# EAGLE board node5-frontend (EAGLE 5.10), part 1 of 2
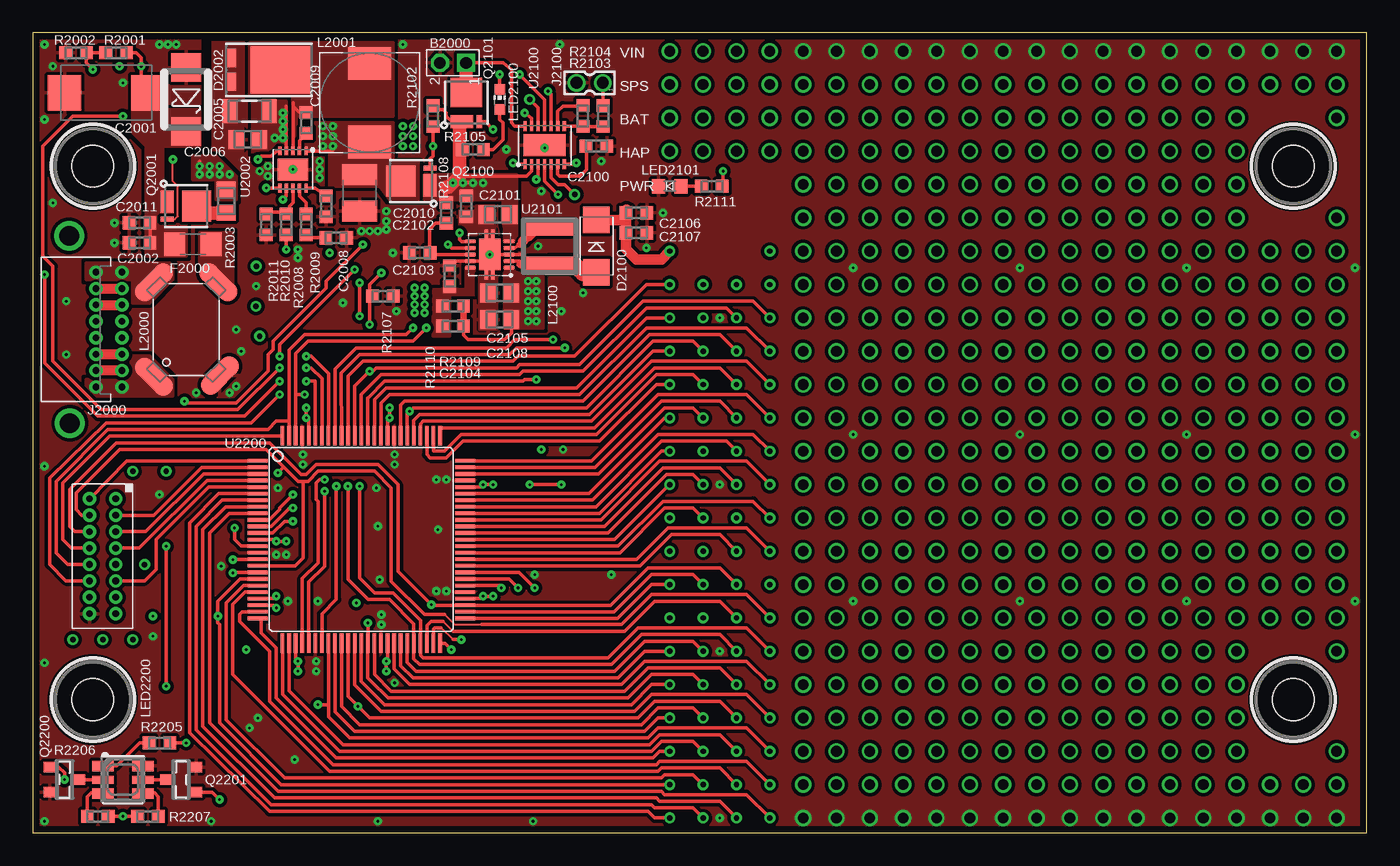
[diagram p0: board, top side]
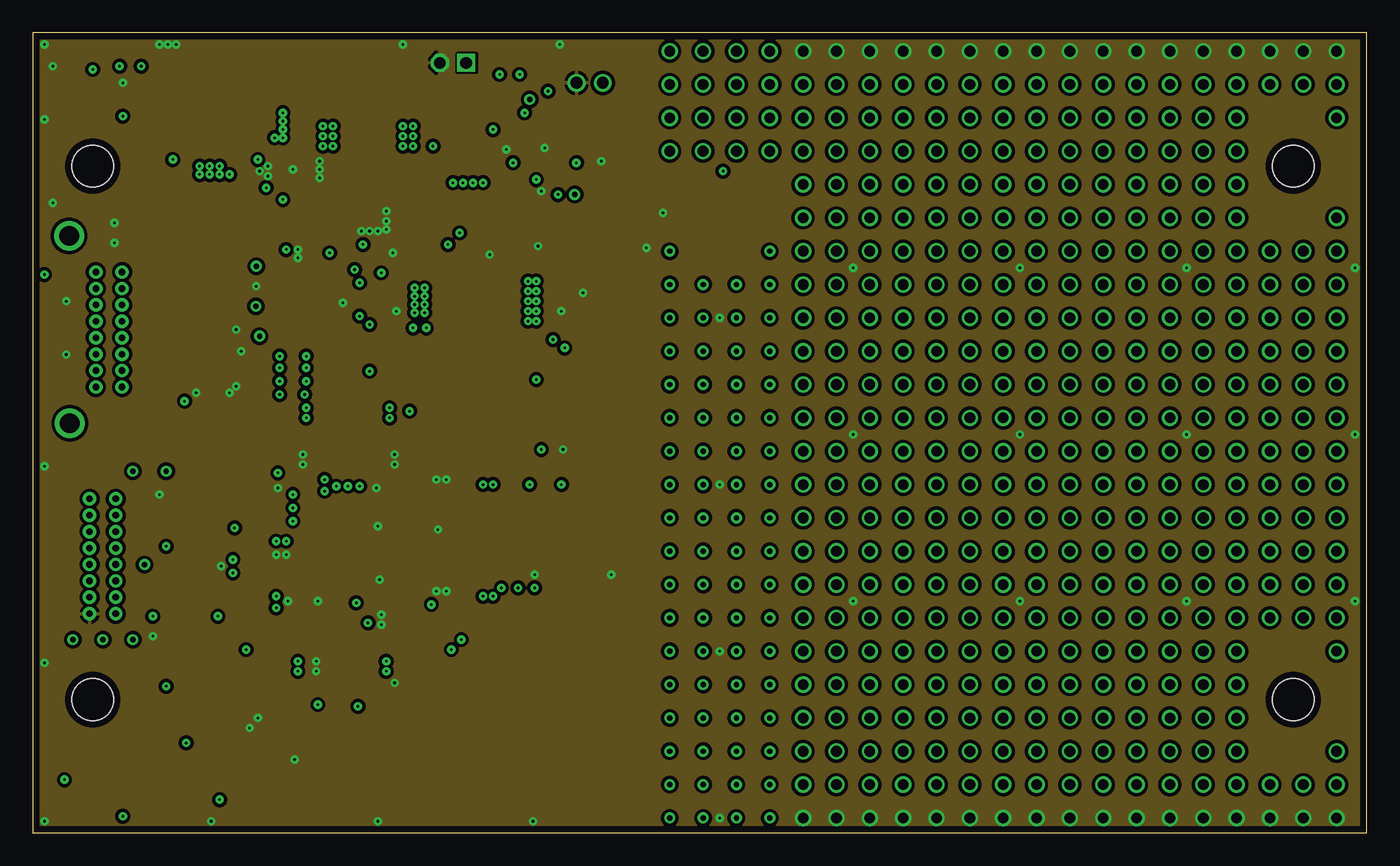
[diagram p1: board, inner layer Route2]
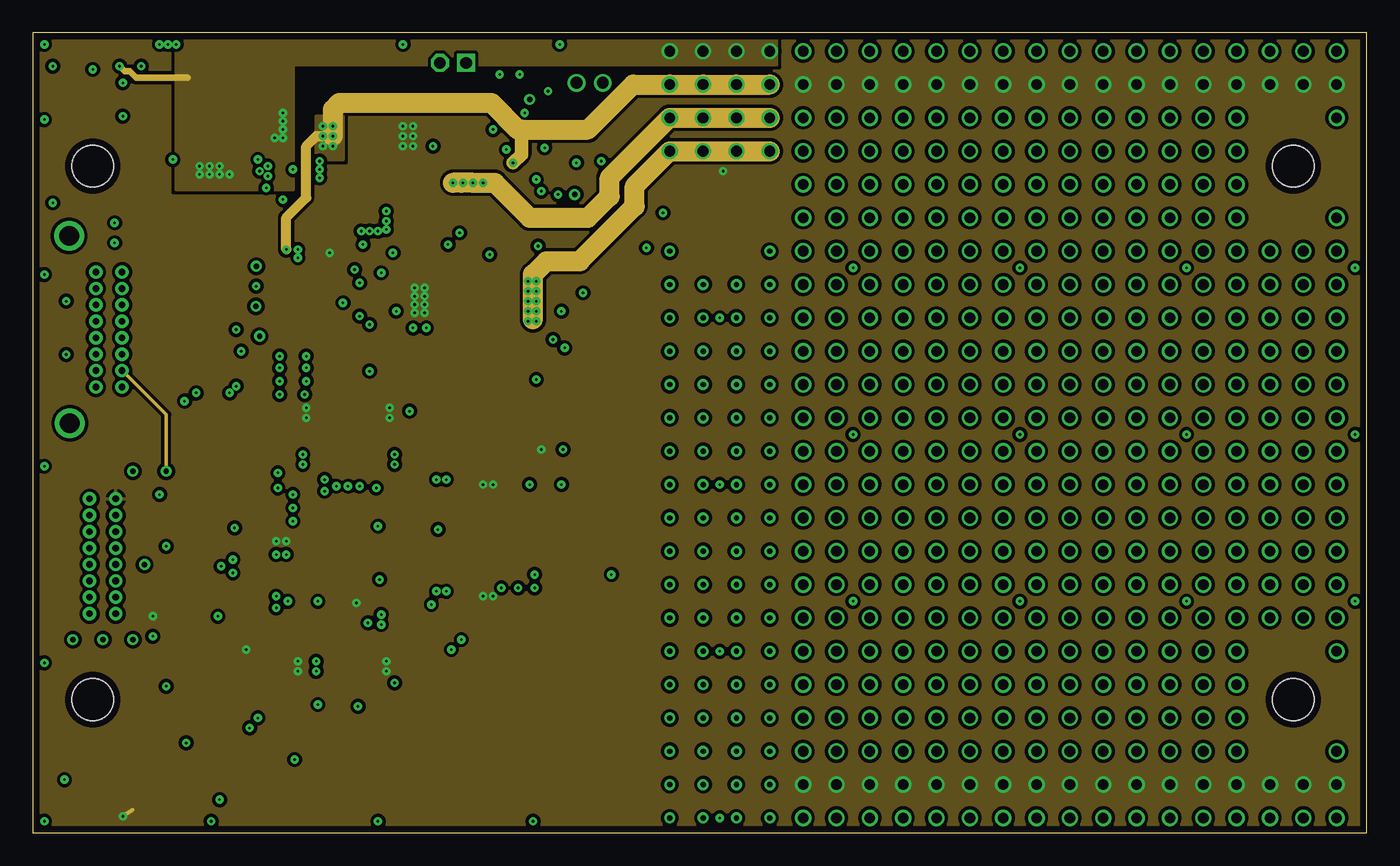
[diagram p2: board, inner layer Route15]
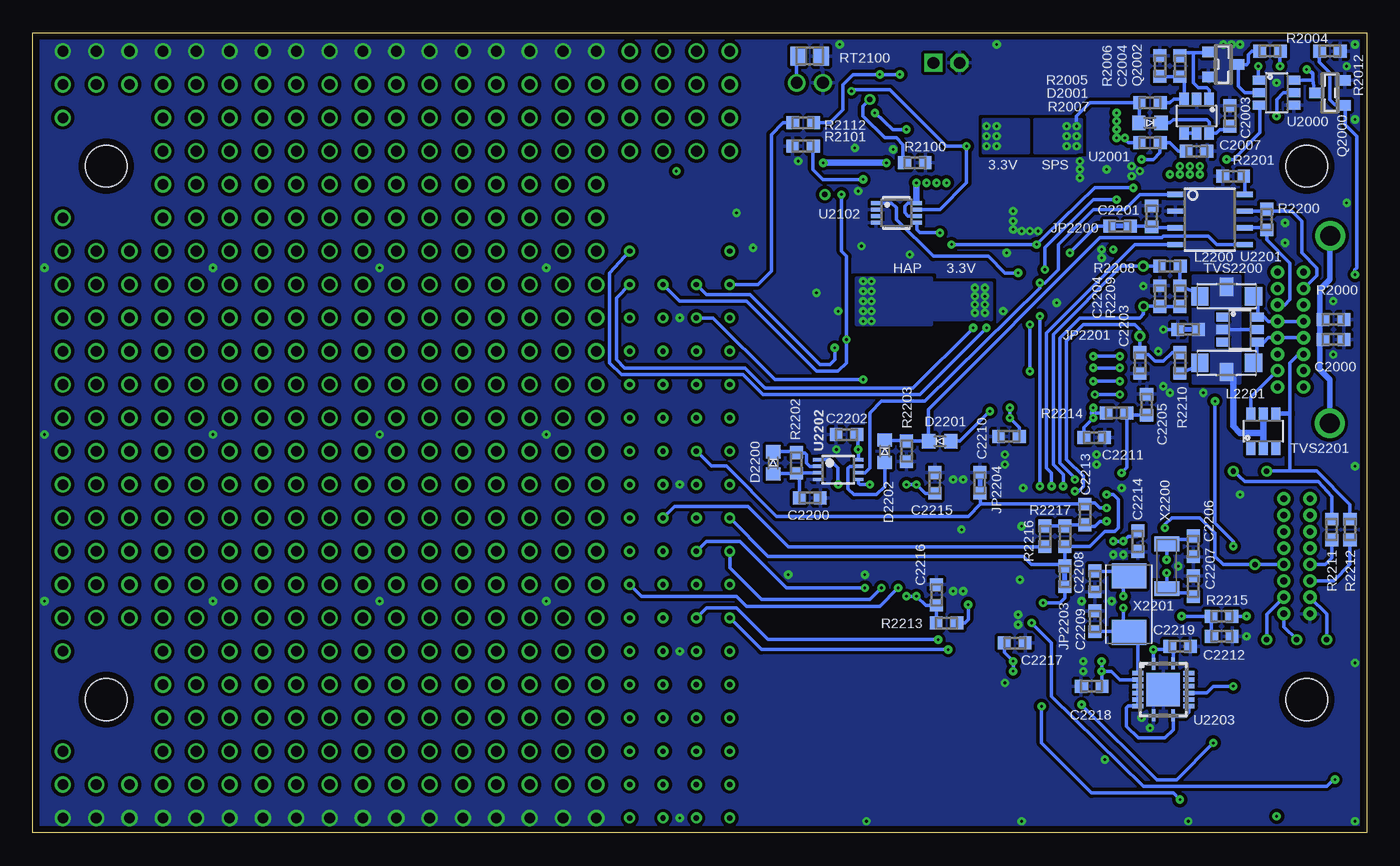
[diagram p3: board, bottom side, seen from below]

Size 101.6 x 60.96 mm. Coordinates in mm from the lower left corner, seen from the top.
Outline: 0,0 101.6,0 101.6,60.96 0,60.96 0,0
Copper layers (1+2*15+16): Top 0.0432mm / dielectric 0.3048mm / Route2 0.0356mm / dielectric 0.7112mm / Route15 0.0356mm / dielectric 0.3023mm / Bottom 0.0432mm
Design rules "sunstone_4lr_rules_v1.3_modifid *": minimum track width 6mil, minimum drill 8mil, track to track 6mil, track to pad 6mil, pad to pad 6mil, via to via 6mil, smd to smd 6mil, copper to edge 20mil, drill to drill 16mil, minimum pad ring 0.2118mm, minimum via ring 0.2118mm, stop-mask expansion 3mil, vias tented up to drill 0mil, thermal gap 10mil
tRestrict: 2 lines

## Footprints (pad centres in the part's own frame; a part is rotated, then mirrored left to right if it is on the bottom)
2MM-1X2-HEADER = drill 0.889 pad 1.372 square: 1 0,-1 | drill 0.889 pad 1.372 octagon: 2 0,1
0603-B-NOSILK = smd 0.95 x 1: 1 -0.8,0; 2 0.8,0
D/7343-31R = smd 2.55 x 2.7: + 3.175,0; - -3.175,0
1206-B = smd 1.15 x 1.8: 1 -1.5,0; 2 1.5,0
0805-B-NOSILK = smd 1.15 x 1.45: 1 -0.9,0; 2 0.9,0
C1210 = smd 1.6 x 2.7: 1 -1.4,0; 2 1.4,0
0603-DIODE = smd 1 x 1.1: A -0.85,0; K 0.85,0
D_POWERDI5 = smd 0.8 x 1.4: ANODE1 -3.47,-0.8; ANODE2 -3.47,1 | smd 4.7 x 3.6: CATHODE 0.4,0.1
NMINIP2-J1 = smd 2 x 2: A 2,0; C -2,0
1206 = smd 1.6 x 1.8: 1 -1.4,0; 2 1.4,0
#4/.250-BARE+STD_WASHER = hole 3.175: 0,0
ROCKETBUS-PKG = drill 0.508 pad 1.016 round: AUX_1@1 0,-1.875; AUX_1@2 2,-1.875; AUX_2@1 0,-3.125; AUX_2@2 2,-3.125; B+@1 0,4.375; B+@2 2,4.375; B-@1 0,-4.375; B-@2 2,-4.375; CAN_H@1 0,3.125; CAN_H@2 2,3.125; CAN_L@1 0,1.875; CAN_L@2 2,1.875; USB_H@1 0,0.625; USB_H@2 2,0.625; USB_L@1 0,-0.625; USB_L@2 2,-0.625 | drill 1.511 round: CHASSIS@1 -2.032,7.136; CHASSIS@2 -1.982,-7.136
87758-0216 = drill 0.9 pad 1.27 round: 1 0,-1; 2 0,1
JST-16R-JED = drill 0.508 pad 1.016 round: 1 2,4.375; 2 0,4.375; 3 2,3.125; 4 0,3.125; 5 2,1.875; 6 0,1.875; 7 2,0.625; 8 0,0.625; 9 2,-0.625; 10 0,-0.625; 11 2,-1.875; 12 0,-1.875; 13 2,-3.125; 14 0,-3.125; 15 2,-4.375; 16 0,-4.375
0603-B-NO-SILK-JUMPER = smd 0.95 x 1: 1 -0.8,0; 2 0.8,0
CMS1 = smd 3.5 x 1.5 rotated 45: 1 3.608,-2.462; 3 -3.608,2.462 | smd 3.5 x 1.5 rotated 315: 2 3.508,2.562; 4 -3.608,-2.462
L-DR74 = smd 2.5 x 3.25: 1 -3,0; 2 3,0
L_NR4018 = smd 1.2 x 3.7: 1 -1.4,0; 2 1.4,0
EXC-CET = smd 1.3 x 1.4: 1 -2.05,0; 2 2.05,0 | smd 1 x 1.4: C 0,-0.7
CHIP-LED0603 = smd 0.8 x 0.8: A 0,-0.75; C 0,0.75
PLCC-6 = smd 1.65 x 0.8: 1 -1.525,1.05; 3 -1.525,-1.05; 4 1.525,-1.05; 6 1.525,1.05 | smd 1.65 x 0.6: 2 -1.525,0; 5 1.525,0
SOT23 = smd 0.787 x 0.889: 1 -0.953,-1.143; 2 0.953,-1.143; 3 0,1.143
1212-8_POWERPAK = smd 0.99 x 1.725: 1-2-3 -1.45,0.33 | smd 0.99 x 0.405: 4 -1.45,-0.99 | smd 2.24 x 2.39: 5-6-7-8 0.797,0
PAD_ROUND-APC-FREE_0.1/016 = drill 0.406 round: PAD 0,0
DO-214AA/SMB = smd 2.159 x 2.261: ANODE -2.438,0; CATHODE 2.438,0
SOT23-6 = smd 0.7 x 1: 1 -0.95,-1.3; 2 0,-1.3; 3 0.95,-1.3; 4 0.95,1.3; 5 0,1.3; 6 -0.95,1.3
DFN-10 = smd 0.25 x 0.675: BD -1,-1.413; BOOST -0.5,-1.413; FB 0,1.413; PG 0.5,1.413; RT -1,1.413; RUN/SS 1,-1.413; SW 0,-1.413; SYNC 1,1.413; VC -0.5,1.413; VIN 0.5,-1.413 | smd 2.38 x 1.65: GND 0,0
DFN-14 = smd 0.25 x 0.7: 1 -1.5,-1.45; 2 -1,-1.45; 3 -0.5,-1.45; 4 0,-1.45; 5 0.5,-1.45; 6 1,-1.45; 7 1.5,-1.45; 8 1.5,1.45; 9 1,1.45; 10 0.5,1.45; 11 0,1.45; 12 -0.5,1.45; 13 -1,1.45; 14 -1.5,1.45 | smd 3.3 x 1.7: PGND 0,0
SON-10 = smd 0.28 x 0.85: EN 1,1.475; FB -1,1.475; GND -0.5,1.475; L1 0.5,-1.475; L2 -0.5,-1.475; PGND 0,-1.475; PS/SYNC 0.5,1.475; VIN 1,-1.475; VINA 0,1.475; VOUT -1,-1.475 | smd 2.4 x 1.65: PGND@1 0,0 | smd 3.8 x 0.28: PGND@2 0,0.25; PGND@3 0,-0.25
VSSOP-8 = smd 0.3 x 0.8: 1 -0.75,-1.55; 2 -0.25,-1.55; 3 0.25,-1.55; 4 0.75,-1.55; 5 0.75,1.55; 6 0.25,1.55; 7 -0.25,1.55; 8 -0.75,1.55
LQFP100 = smd 0.28 x 1.5: #RESET 2,-7.9; #RSTOUT 0.5,-7.9; #TRST -4.5,-7.9; P0[15]/TXD1/SCK0/SCK 0.5,7.9; P0[16]/RXD1/SSEL0/SSEL 0,7.9; P0[17]/CTS1/MISO0/MISO 1,7.9; P0[18]/DCD1/MOSI0/MOSI 1.5,7.9; P0[19]/DSR1/MCICLK/SDA1 2,7.9; P0[20]/DTR1/MCICMD/SCL1 2.5,7.9; P0[21]/RI1/MCIPWR/RD1 3,7.9; P0[22]/RTS1/MCIDAT0/TD1 3.5,7.9; P0[23]/AD0[0]/I2SRX_CLK/CAP3[0] -2,-7.9; P0[24]/AD0[1]/I2SRX_WS/CAP3[1] -2.5,-7.9; P0[25]/AD0[2]/I2SRX_SDA/TXD3 -3,-7.9; P0[26]/AD0[3]/AOUT/RXD3 -3.5,-7.9; P0[27]/SDA0 6,-7.9; P0[28]/SCL0 5.5,-7.9; P1[30]/VBUS/AD0[4] 4,-7.9; P1[31]/SCK1/AD0[5] 3.5,-7.9; P2[0]/PWM1[1]/TXD1/TRACECLK -6,7.9; P2[1]/PWM1[2]/RXD1/PIPESTAT0 -5.5,7.9; P2[2]/PWM1[3]/CTS1/PIPESTAT1 -5,7.9; P2[3]/PWM1[4]/DCD1/PIPESTAT2 -3.5,7.9; P2[4]/PWM1[5]/DSR1/TRACESYNC -3,7.9; P2[5]/PWM1[6]/DTR1/TRACEPKT0 -2.5,7.9; P2[6]/PCAP1[0]/RI1/TRACEPKT1 -2,7.9; P2[7]/RD2/RTS1/TRACEPKT2 -1.5,7.9; P2[8]/TD2/TXD2/TRACEPKT3 -1,7.9; P2[9]/USB_CONNECT/RXD2/EXTIN0 -0.5,7.9; P2[10]/#EINT0 5,7.9; P2[11]/#EINT1/MCIDAT1/I2STX_CLK 5.5,7.9; P2[12]/#EINT2/MCIDAT2/I2STX_WS 6,7.9; RTCX1 1.5,-7.9; RTCX2 2.5,-7.9; TCK -4,-7.9; TDI -5.5,-7.9; TDO -6,-7.9; TMS -5,-7.9; VBAT 3,-7.9; VDD(3V3)@1 4.5,7.9; VDD(3V3)@2 -4,7.9; VDD(DCDC)(3V3) 0,-7.9; VDDA -1.5,-7.9; VREF -0.5,-7.9; VSS 1,-7.9; VSS@3 4,7.9; VSS@4 -4.5,7.9; VSSA -1,-7.9; XTAL1 4.5,-7.9; XTAL2 5,-7.9 | smd 1.5 x 0.28: P0[0]/RD1/TXD3/SDA1 7.9,4; P0[1]/TD1/RXD3/SCL1 7.9,4.5; P0[2]/TXD0 -7.9,-5; P0[3]/RXD0 -7.9,-5.5; P0[4]/I2SRX_CLK/RD2/CAP2[0] -7.9,3.5; P0[5]/I2SRX_WS/TD2/CAP2[1] -7.9,4; P0[6]/I2SRX_SDA/SSEL1/MAT2[0] -7.9,4.5; P0[7]/I2STX_CLK/SCK1/MAT2[1] -7.9,5; P0[8]/I2STX_WS/MISO1/MAT2[2] -7.9,5.5; P0[9]/I2STX_SDA/MOSI1/MAT2[3] -7.9,6; P0[10]/TXD2/SDA2/MAT3[0] 7.9,5; P0[11]/RXD2/SCL2/MAT3[1] 7.9,5.5; P0[29]/USB_D+ 7.9,-4.5; P0[30]/USB_D- 7.9,-4; P1[0]/ENET_TXD0 -7.9,-3.5; P1[1]/ENET_TXD1 -7.9,-3; P1[4]/ENET_TX_EN -7.9,-2.5; P1[8]/ENET_CRS -7.9,-2; P1[9]/ENET_RXD0 -7.9,-1.5; P1[10]/ENET_RXD1 -7.9,-1; P1[14]/ENET_RX_ER -7.9,-0.5; P1[15]/ENET_REF_CLK -7.9,0; P1[16]/ENET_MDC -7.9,0.5; P1[17]/ENET_MDIO -7.9,1; P1[18]/USB_UP_LED/PWM1[1]/CAP1[0] 7.9,-3; P1[19]/CAP1[1] 7.9,-2.5; P1[20]/PWM1[2]/SCK0 7.9,-2; P1[21]/PWM1[3]/SSEL0 7.9,-1.5; P1[22]MAT1[0] 7.9,-1; P1[23]/PWM1[4]/MISO0 7.9,-0.5; P1[24]/PWM1[5]/MOSI0 7.9,0; P1[25]/MAT1[1] 7.9,0.5; P1[26]/PWM1[6]/CAP0[0] 7.9,1; P1[27]/CAP0[1] 7.9,2.5; P1[28]/PCAP1[0]/MAT0[0] 7.9,3; P1[29]/PCAP1[1]/MAT0[1] 7.9,3.5; P2[13]/#EINT3/MCIDAT3/I2STX_SDA 7.9,6; P3[25]/MAT0[0]/PWM1[2] 7.9,-5.5; P3[26]/MAT0[1]/PWM1[3] 7.9,-6; P4[28]/MAT2[0]/TXD3 -7.9,3; P4[29]/MAT2[1]/RXD3 -7.9,1.5; RTCK -7.9,-6; VDD(3V3) 7.9,-5; VDD(3V3)@3 -7.9,-4; VDD(DCDC)(3V3)@1 7.9,2; VDD(DCDC)(3V3)@2 -7.9,2; VSS@1 7.9,-3.5; VSS@2 7.9,1.5; VSS@5 -7.9,-4.5; VSS@6 -7.9,2.5
DR-PDSO-G8 = smd 0.4 x 1.2: 1 -1.905,-2.65; 2 -0.635,-2.65; 3 0.635,-2.65; 4 1.905,-2.65; 5 1.905,2.65; 6 0.635,2.65; 7 -0.635,2.65; 8 -1.905,2.65
DCU = smd 0.25 x 0.75: 1 -0.75,-1.55; 2 -0.25,-1.55; 3 0.25,-1.55; 4 0.75,-1.55; 5 0.75,1.55; 6 0.25,1.55; 7 -0.25,1.55; 8 -0.75,1.55
QFN-16 = smd 0.85 x 0.28: 1 -1.97,-0.75; 8 1.97,-0.74; 9 1.97,0.75; 16 -1.98,0.75 | smd 0.28 x 0.85: 2 -1.25,-1.95; 3 -0.75,-1.95; 4 -0.25,-1.95; 5 0.25,-1.95; 6 0.75,-1.95; 7 1.25,-1.95; 10 1.25,1.95; 11 0.75,1.95; 12 0.25,1.95; 13 -0.25,1.95; 14 -0.75,1.95; 15 -1.25,1.95 | smd 2.55 x 2.55: PGND 0,0
CM415 = smd 1.118 x 1.905: P$1 -1.702,0; P$2 1.702,0
CS10 = smd 1.9 x 2.6: P$1 -2.15,0; P$2 2.15,0

## Placement (x,y rotation side)
B2100  BATTERY_SINGLE_CELL_2MM  [2MM-1X2-HEADER]  32,58.67 90 top
C2000  100n 50V  [0603-B-NOSILK]  2.54,37.59 0 bottom
C2001  22u 50V  [D/7343-31R]  5.59,56.39 0 top
C2002  330n 50V  [0603-B-NOSILK]  8.13,44.96 0 top
C2003  2.7u  [0603-B-NOSILK]  10.41,54.61 270 bottom
C2004  15n  [0603-B-NOSILK]  14.22,58.42 90 bottom
C2005  10u 50V  [1206-B]  16.51,54.99 180 top
C2006  1u 50V  [0805-B-NOSILK]  16.38,52.83 180 top
C2007  100n  [0603-B-NOSILK]  12.95,51.94 180 bottom
C2008  680p  [0603-B-NOSILK]  23.11,45.34 180 top
C2009  220n  [0603-B-NOSILK]  20.83,54.1 90 top
C2010  22u  [C1210]  24.89,48.77 270 top
C2011  10n 50V  [0603-B-NOSILK]  8.13,46.48 0 top
C2100  66n  [0603-B-NOSILK]  42.93,52.32 180 top
C2101  10u  [0805-B-NOSILK]  35.43,47.12 0 top
C2102  100n  [0603-B-NOSILK]  33.02,47.75 90 top
C2103  100n  [0603-B-NOSILK]  29.46,44.2 0 top
C2104  2pF  [0603-B-NOSILK]  32,38.61 0 top
C2105  10u  [0805-B-NOSILK]  35.56,41.15 0 top
C2106  TBD  [0603-B-NOSILK]  45.97,47.24 180 top
C2107  TBD  [0603-B-NOSILK]  45.97,45.72 180 top
C2108  10u  [0805-B-NOSILK]  35.56,39.12 0 top
C2200  10n  [0603-B-NOSILK]  42.42,25.53 180 bottom
C2201  100n  [0603-B-NOSILK]  16.38,46.99 90 bottom
C2202  100n  [0603-B-NOSILK]  39.62,30.35 180 bottom
C2203  18p  [0603-B-NOSILK]  17.27,35.81 90 bottom
C2204  18p  [0603-B-NOSILK]  15.75,40.89 270 bottom
C2205  100n  [0603-B-NOSILK]  16.76,32.64 90 bottom
C2206  22p  [0603-B-NOSILK]  13.21,21.84 90 bottom
C2207  22p  [0603-B-NOSILK]  13.21,18.8 270 bottom
C2208  39p  [0603-B-NOSILK]  20.7,19.18 90 bottom
C2209  33p  [0603-B-NOSILK]  20.7,16.13 270 bottom
C2210  100n  [0603-B-NOSILK]  27.24,30.21 180 bottom
C2211  100n  [0603-B-NOSILK]  20.76,30.12 0 bottom
C2212  100n  [0603-B-NOSILK]  11.05,14.99 0 bottom
C2213  100n  [0603-B-NOSILK]  21.46,24.26 270 bottom
C2214  100n  [0603-B-NOSILK]  17.43,22.23 270 bottom
C2215  100n  [0603-B-NOSILK]  32.89,26.67 90 bottom
C2216  100n  [0603-B-NOSILK]  32.77,18.14 90 bottom
C2217  100n  [0603-B-NOSILK]  26.8,14.48 180 bottom
C2218  100n  [0603-B-NOSILK]  20.95,11.18 0 bottom
C2219  100n  [0603-B-NOSILK]  14.22,14.22 0 bottom
D2001  CDSU101A  [0603-DIODE]  16.51,54.1 0 bottom
D2002  PDS340  [D_POWERDI5]  18.54,58.04 0 top
D2100  MA2Q705  [NMINIP2-J1]  42.93,44.7 270 top
D2200  CDSU101A  [0603-DIODE]  45.21,28.19 90 bottom
D2201  CDSU101A  [0603-DIODE]  32.51,29.84 180 bottom
D2202  CDSU101A  [0603-DIODE]  36.7,29.08 90 bottom
F2000  2.0A Fast  [1206]  12.19,44.83 180 top
FST2000  #4-BARE_MOUNTING_HOLE/.250  [#4/.250-BARE+STD_WASHER]  4.57,50.8 0 top
FT2001  #4-BARE_MOUNTING_HOLE/.250  [#4/.250-BARE+STD_WASHER]  4.57,10.16 0 top
FT2002  #4-BARE_MOUNTING_HOLE/.250  [#4/.250-BARE+STD_WASHER]  96.01,10.16 0 top
FT2003  #4-BARE_MOUNTING_HOLE/.250  [#4/.250-BARE+STD_WASHER]  96.01,50.8 0 top
J2000  ROCKETBUS  [ROCKETBUS-PKG]  4.8,38.35 0 top
J2100  87758-0216  [87758-0216]  42.42,57.15 90 top
J2204  DEBUG-CONNECTOR  [JST-16R-JED]  4.32,21.08 0 top
JP2200  0603-B-NO-SILK-CUT-JUMPER  [0603-B-NO-SILK-JUMPER]  18.8,46.23 180 bottom
JP2201  0603-B-NO-SILK-CUT-JUMPER  [0603-B-NO-SILK-JUMPER]  13.59,38.35 180 bottom
JP2203  0603-B-NO-SILK-CUT-JUMPER  [0603-B-NO-SILK-JUMPER]  22.99,19.56 90 bottom
JP2204  0603-B-NO-SILK-CUT-JUMPER  [0603-B-NO-SILK-JUMPER]  29.46,26.67 270 bottom
L2000  CMS1  [CMS1]  11.68,38.35 270 top
L2001  L_DR74-6R8-R  [L-DR74]  25.65,55.63 270 top
L2100  2.2 uH L_NR4018T2R2M  [L_NR4018]  39.37,44.7 270 top
L2200  EXC-CET471U  [EXC-CET]  10.67,40.89 180 bottom
L2201  FILTER_EMI-EXC-CET  [EXC-CET]  10.67,35.81 0 bottom
LED2100  RED  [CHIP-LED0603]  35.56,55.88 0 top
LED2101  LED-GRN-  [0603-DIODE]  48.51,49.28 180 top
LED2200  [PLCC-6]  6.86,4.06 0 top
Q2000  PMV45EN  [SOT23]  2.79,56.39 90 bottom
Q2001  Si7309DN  [1212-8_POWERPAK]  11.68,47.75 0 top
Q2002  PMV45EN  [SOT23]  10.92,58.55 270 bottom
Q2100  SI7123DN  [1212-8_POWERPAK]  28.83,49.66 180 top
Q2101  SI7123DN  [1212-8_POWERPAK]  33.02,55.63 90 top
Q2200  PMV45EN  [SOT23]  2.41,4.06 270 top
Q2201  PMV45EN  [SOT23]  11.3,4.06 90 top
R2000  100k  [0603-B-NOSILK]  2.54,39.12 0 bottom
R2001  61.9k  [0603-B-NOSILK]  6.35,59.44 0 top
R2002  10k  [0603-B-NOSILK]  3.3,59.44 0 top
R2003  .033  [0805-B-NOSILK]  14.73,48.13 90 top
R2004  1k  [0603-B-NOSILK]  7.37,59.56 0 bottom
R2005  34.0k 1%  [0603-B-NOSILK]  16.51,55.63 180 bottom
R2006  10k 1%  [0603-B-NOSILK]  15.75,58.42 270 bottom
R2007  500k  [0603-B-NOSILK]  16.51,52.58 180 bottom
R2008  15k  [0603-B-NOSILK]  20.83,46.35 90 top
R2009  26.7k  [0603-B-NOSILK]  22.35,47.75 90 top
R2010  532k  [0603-B-NOSILK]  19.3,46.35 270 top
R2011  100k  [0603-B-NOSILK]  17.78,46.35 90 top
R2012  10k  [0603-B-NOSILK]  2.79,59.56 180 bottom
R2100  100k  [0603-B-NOSILK]  34.42,51.05 0 bottom
R2101  660  [0603-B-NOSILK]  42.93,52.32 180 bottom
R2102  1k  [0603-B-NOSILK]  30.48,54.61 90 top
R2103  121k 1%  [0603-B-NOSILK]  41.91,54.61 270 top
R2104  15k 1%  [0603-B-NOSILK]  43.43,54.61 90 top
R2105  1.6k  [0603-B-NOSILK]  33.53,52.07 0 top
R2107  1k  [0603-B-NOSILK]  26.67,40.89 180 top
R2108  100  [0603-B-NOSILK]  31.5,47.24 90 top
R2109  1.0M  [0603-B-NOSILK]  32,40.13 0 top
R2110  200k  [0603-B-NOSILK]  31.75,42.42 270 top
R2111  1k  [0603-B-NOSILK]  51.71,49.28 0 top
R2112  10k  [0603-B-NOSILK]  42.93,54.1 0 bottom
R2200  NP  [0603-B-NOSILK]  7.62,46.74 90 bottom
R2201  18k  [0603-B-NOSILK]  10.16,50.04 0 bottom
R2202  10k  [0603-B-NOSILK]  43.43,28.19 90 bottom
R2203  10k  [0603-B-NOSILK]  35.05,29.08 90 bottom
R2205  1k  [0603-B-NOSILK]  9.65,6.86 0 top
R2206  1k  [0603-B-NOSILK]  4.95,1.27 180 top
R2207  1k  [0603-B-NOSILK]  8.76,1.27 0 top
R2208  1.5k  [0603-B-NOSILK]  14.99,43.18 180 bottom
R2209  33.2  [0603-B-NOSILK]  14.22,40.89 270 bottom
R2210  33.2  [0603-B-NOSILK]  14.22,35.81 90 bottom
R2211  100  [0603-B-NOSILK]  2.67,23.11 270 bottom
R2212  100  [0603-B-NOSILK]  1.27,23.11 270 bottom
R2213  10k  [0603-B-NOSILK]  32,16 180 bottom
R2214  10k  [0603-B-NOSILK]  19.05,32 180 bottom
R2215  0  [0603-B-NOSILK]  11.05,16.51 180 bottom
R2216  0  [0603-B-NOSILK]  24.51,22.61 90 bottom
R2217  0  [0603-B-NOSILK]  22.99,22.61 90 bottom
RT2100  100k @25C  [0805-B-NOSILK]  42.42,59.18 0 bottom
TP0.0  PAD_ROUND016  [PAD_ROUND-APC-FREE_0.1/016]  53.59,13.84 90 top
TP0.1  PAD_ROUND016  [PAD_ROUND-APC-FREE_0.1/016]  56.13,13.84 90 top
TP0.2  PAD_ROUND016  [PAD_ROUND-APC-FREE_0.1/016]  56.13,41.78 180 top
TP0.3  PAD_ROUND016  [PAD_ROUND-APC-FREE_0.1/016]  56.13,44.32 180 top
TP0.4  PAD_ROUND016  [PAD_ROUND-APC-FREE_0.1/016]  51.05,36.7 270 top
TP0.5  PAD_ROUND016  [PAD_ROUND-APC-FREE_0.1/016]  48.51,36.7 270 top
TP0.6  PAD_ROUND016  [PAD_ROUND-APC-FREE_0.1/016]  56.13,34.16 270 top
TP0.7  PAD_ROUND016  [PAD_ROUND-APC-FREE_0.1/016]  48.51,34.16 270 top
TP0.8  PAD_ROUND016  [PAD_ROUND-APC-FREE_0.1/016]  51.05,34.16 270 top
TP0.9  PAD_ROUND016  [PAD_ROUND-APC-FREE_0.1/016]  53.59,34.16 270 top
TP0.10  PAD_ROUND016  [PAD_ROUND-APC-FREE_0.1/016]  53.59,16.38 90 top
TP0.11  PAD_ROUND016  [PAD_ROUND-APC-FREE_0.1/016]  51.05,16.38 90 top
TP0.12  PAD_ROUND016  [PAD_ROUND-APC-FREE_0.1/016]  37.85,55.88 0 top
TP0.15  PAD_ROUND016  [PAD_ROUND-APC-FREE_0.1/016]  56.13,24 270 top
TP0.16  PAD_ROUND016  [PAD_ROUND-APC-FREE_0.1/016]  48.51,26.54 270 top
TP0.17  PAD_ROUND016  [PAD_ROUND-APC-FREE_0.1/016]  51.05,24 270 top
TP0.18  PAD_ROUND016  [PAD_ROUND-APC-FREE_0.1/016]  56.13,21.46 270 top
TP0.19  PAD_ROUND016  [PAD_ROUND-APC-FREE_0.1/016]  53.59,21.46 270 top
TP0.20  PAD_ROUND016  [PAD_ROUND-APC-FREE_0.1/016]  51.05,21.46 270 top
TP0.21  PAD_ROUND016  [PAD_ROUND-APC-FREE_0.1/016]  48.51,21.46 270 top
TP0.22  PAD_ROUND016  [PAD_ROUND-APC-FREE_0.1/016]  56.13,18.92 270 top
TP0.23  PAD_ROUND016  [PAD_ROUND-APC-FREE_0.1/016]  56.13,1.14 90 top
TP0.24  PAD_ROUND016  [PAD_ROUND-APC-FREE_0.1/016]  53.59,1.14 270 top
TP0.25  PAD_ROUND016  [PAD_ROUND-APC-FREE_0.1/016]  51.05,1.14 180 top
TP0.26  PAD_ROUND016  [PAD_ROUND-APC-FREE_0.1/016]  48.51,1.14 90 top
TP0.27  PAD_ROUND016  [PAD_ROUND-APC-FREE_0.1/016]  48.51,6.22 180 top
TP0.28  PAD_ROUND016  [PAD_ROUND-APC-FREE_0.1/016]  56.13,3.68 180 top
TP0.29  PAD_ROUND016  [PAD_ROUND-APC-FREE_0.1/016]  16.99,40.12 90 top
TP0.30  PAD_ROUND016  [PAD_ROUND-APC-FREE_0.1/016]  17.27,37.85 90 top
TP1.1  PAD_ROUND016  [PAD_ROUND-APC-FREE_0.1/016]  41.27,48.64 0 top
TP1.8  PAD_ROUND016  [PAD_ROUND-APC-FREE_0.1/016]  53.59,41.78 270 top
TP1.9  PAD_ROUND016  [PAD_ROUND-APC-FREE_0.1/016]  51.05,41.78 270 top
TP1.10  PAD_ROUND016  [PAD_ROUND-APC-FREE_0.1/016]  48.51,41.78 270 top
TP1.14  PAD_ROUND016  [PAD_ROUND-APC-FREE_0.1/016]  56.13,39.24 90 top
TP1.15  PAD_ROUND016  [PAD_ROUND-APC-FREE_0.1/016]  53.59,39.24 90 top
TP1.16  PAD_ROUND016  [PAD_ROUND-APC-FREE_0.1/016]  51.05,39.24 90 top
TP1.17  PAD_ROUND016  [PAD_ROUND-APC-FREE_0.1/016]  48.51,39.24 270 top
TP1.18  PAD_ROUND016  [PAD_ROUND-APC-FREE_0.1/016]  17.02,43.18 90 top
TP1.19  PAD_ROUND016  [PAD_ROUND-APC-FREE_0.1/016]  56.13,6.22 90 top
TP1.20  PAD_ROUND016  [PAD_ROUND-APC-FREE_0.1/016]  48.51,8.76 90 top
TP1.21  PAD_ROUND016  [PAD_ROUND-APC-FREE_0.1/016]  51.05,8.76 90 top
TP1.22  PAD_ROUND016  [PAD_ROUND-APC-FREE_0.1/016]  53.59,8.76 270 top
TP1.23  PAD_ROUND016  [PAD_ROUND-APC-FREE_0.1/016]  56.13,8.76 90 top
TP1.24  PAD_ROUND016  [PAD_ROUND-APC-FREE_0.1/016]  48.51,11.3 90 top
TP1.25  PAD_ROUND016  [PAD_ROUND-APC-FREE_0.1/016]  51.05,11.3 270 top
TP1.26  PAD_ROUND016  [PAD_ROUND-APC-FREE_0.1/016]  53.59,11.3 270 top
TP1.27  PAD_ROUND016  [PAD_ROUND-APC-FREE_0.1/016]  56.13,11.3 270 top
TP1.28  PAD_ROUND016  [PAD_ROUND-APC-FREE_0.1/016]  48.51,13.84 270 top
TP1.29  PAD_ROUND016  [PAD_ROUND-APC-FREE_0.1/016]  51.05,13.84 270 top
TP1.30  PAD_ROUND016  [PAD_ROUND-APC-FREE_0.1/016]  53.59,3.68 0 top
TP1.31  PAD_ROUND016  [PAD_ROUND-APC-FREE_0.1/016]  51.05,3.68 0 top
TP2.0  PAD_ROUND016  [PAD_ROUND-APC-FREE_0.1/016]  56.13,31.62 0 top
TP2.1  PAD_ROUND016  [PAD_ROUND-APC-FREE_0.1/016]  53.59,31.62 0 top
TP2.2  PAD_ROUND016  [PAD_ROUND-APC-FREE_0.1/016]  51.05,31.62 0 top
TP2.3  PAD_ROUND016  [PAD_ROUND-APC-FREE_0.1/016]  48.51,31.62 90 top
TP2.4  PAD_ROUND016  [PAD_ROUND-APC-FREE_0.1/016]  56.13,29.08 90 top
TP2.5  PAD_ROUND016  [PAD_ROUND-APC-FREE_0.1/016]  53.59,29.08 90 top
TP2.6  PAD_ROUND016  [PAD_ROUND-APC-FREE_0.1/016]  48.51,29.08 90 top
TP2.7  PAD_ROUND016  [PAD_ROUND-APC-FREE_0.1/016]  56.13,26.54 90 top
TP2.8  PAD_ROUND016  [PAD_ROUND-APC-FREE_0.1/016]  53.59,26.54 90 top
TP2.9  PAD_ROUND016  [PAD_ROUND-APC-FREE_0.1/016]  51.05,26.54 90 top
TP2.10  PAD_ROUND016  [PAD_ROUND-APC-FREE_0.1/016]  53.59,18.92 270 top
TP2.11  PAD_ROUND016  [PAD_ROUND-APC-FREE_0.1/016]  51.05,18.92 270 top
TP2.12  PAD_ROUND016  [PAD_ROUND-APC-FREE_0.1/016]  48.51,18.92 270 top
TP2.13  PAD_ROUND016  [PAD_ROUND-APC-FREE_0.1/016]  48.51,16.38 270 top
TP3.25  PAD_ROUND016  [PAD_ROUND-APC-FREE_0.1/016]  53.59,6.22 0 top
TP3.26  PAD_ROUND016  [PAD_ROUND-APC-FREE_0.1/016]  51.05,6.22 0 top
TP4.28  PAD_ROUND016  [PAD_ROUND-APC-FREE_0.1/016]  53.59,36.7 270 top
TP4.29  PAD_ROUND016  [PAD_ROUND-APC-FREE_0.1/016]  56.13,36.7 270 top
TP-AUX1  PAD_ROUND016  [PAD_ROUND-APC-FREE_0.1/016]  7.62,27.56 0 top
TP-AUX2  PAD_ROUND016  [PAD_ROUND-APC-FREE_0.1/016]  10.16,27.56 0 top
TP-AVCC  PAD_ROUND016  [PAD_ROUND-APC-FREE_0.1/016]  48.51,24 270 top
TP-DBG13  PAD_ROUND016  [PAD_ROUND-APC-FREE_0.1/016]  7.62,14.73 270 top
TP-DBG14  PAD_ROUND016  [PAD_ROUND-APC-FREE_0.1/016]  3.05,14.73 180 top
TP-DBG15  PAD_ROUND016  [PAD_ROUND-APC-FREE_0.1/016]  5.33,14.73 180 top
TP-HAP-5V  t24  [PAD_ROUND-APC-FREE_0.1/016]  48.51,44.32 270 top
TP-NRST  PAD_ROUND016  [PAD_ROUND-APC-FREE_0.1/016]  56.13,16.38 90 top
TP-NRST0UT  PAD_ROUND016  [PAD_ROUND-APC-FREE_0.1/016]  8.51,20.45 180 top
TP-VBAT  t24  [PAD_ROUND-APC-FREE_0.1/016]  48.51,3.68 0 top
TP-VREF  t24  [PAD_ROUND-APC-FREE_0.1/016]  53.59,24 90 top
TP-VREF-GND  t24  [PAD_ROUND-APC-FREE_0.1/016]  51.05,29.08 90 top
TVS2000  TVS_SMB  [DO-214AA/SMB]  11.68,55.88 270 top
TVS2200  SN65220DBVR  [SOT23-6]  9.65,38.35 270 bottom
TVS2201  SN65220DBVR  [SOT23-6]  7.87,30.61 0 bottom
U2000  MAX5902AAEUT  [SOT23-6]  6.86,56.39 270 bottom
U2001  TLV3012AIDBVT  [SOT23-6]  12.95,54.61 180 bottom
U2002  IC_LT3972  [DFN-10]  19.81,50.55 180 top
U2100  IC_LTC4085  [DFN-14]  38.99,52.4 0 top
U2101  IC_TPS63000  [SON-10]  34.8,44.07 90 top
U2102  [VSSOP-8]  35.81,47.24 270 bottom
U2200  IC_LPC2368  [LQFP100]  25.02,22.35 270 top
U2201  IC_SN65HVD235  [DR-PDSO-G8]  11.94,46.74 270 bottom
U2202  74LVC3G14DCU  [DCU]  40.26,27.69 270 bottom
U2203  IC_SN74LV163A  [QFN-16]  15.49,10.92 270 bottom
X2200  32.768 kHz  [CM415]  15.24,20.32 90 bottom
X2201  12.0 MHz  [CS10]  18.1,17.43 270 bottom

## Library data of the parts
B2100 D2001 D2200-D2202 L2200 L2201 LED2101 TP0.0 TP0.1-TP0.12 TP0.15-TP0.30 TP1.1 TP1.8-TP1.10 TP1.14-TP1.31 TP2.0 TP2.1-TP2.13 TP3.25 TP3.26 TP4.28 TP4.29 TP-AUX1 TP-AUX2 TP-AVCC TP-DBG13-TP-DBG15 TP-HAP-5V TP-NRST TP-NRST0UT TP-VBAT TP-VREF TP-VREF-GND = psas_eagle_library
C2000 C2002-C2009 C2011 C2100-C2108 C2200-C2219 R2000-R2012 R2100-R2105 R2107-R2112 R2200-R2203 R2205-R2217 RT2100 = rcl_custom
C2001 C2010 = rcl
D2002 = 0kaz; DIGIKEY: PDS340DICT-ND
D2100 F2000 = custom
FST2000 FT2001-FT2003 = mount
J2000 J2204 = ScottsLib
J2100 = con-molex
JP2200 JP2201 JP2203 JP2204 = cut-jumper
L2000 = choke
L2001 L2100 Q2001 Q2100 Q2101 TVS2000 U2100 U2101 U2200 U2201 U2203 = 0kaz
LED2100 = led
LED2200 Q2000 Q2002 Q2200 Q2201 = Tova
TVS2200 TVS2201 U2000 U2001 X2200 X2201 = node4
U2002 = 0kaz; DIGIKEY: LT3972EDD#PBF-ND
U2102 = apdm
U2202 = 74x3g14

## Nets
3.3V: C2202.1 C2210.1 C2211.1 C2214.1 C2215.1 C2216.1 C2217.2 C2218.2 C2219.1 J2204.1 JP2200.2 JP2203.1 R2111.2 R2206.1 R2207.1 R2213.2 R2214.2 R2215.1 U2200.VDD(3V3) U2200.VDD(3V3)@1 U2200.VDD(3V3)@2 U2200.VDD(3V3)@3 U2200.VDD(DCDC)(3V3) U2200.VDD(DCDC)(3V3)@1 U2200.VDD(DCDC)(3V3)@2 U2202.8 U2203.1 U2203.3 U2203.4 U2203.5 U2203.6 U2203.7 U2203.9 U2203.10 U2203.16
!RESET!: C2205.1 J2204.4 R2214.1 TP-NRST.PAD U2200.#RESET
!RSTOUT!: J2204.9 TP-NRST0UT.PAD U2200.#RSTOUT
!SPS_POWER_PRESENT!: Q2100.4 R2102.1 U2100.10 U2102.7
!TRST!: J2204.7 U2200.#TRST
A_3P3: JP2203.2 R2217.1 TP-AVCC.PAD U2200.VDDA
A_GND: C2213.1 JP2204.2 TP-VREF-GND.PAD U2200.VSSA
AUX_1.2: J2000.AUX_1@1 J2000.AUX_1@2 R2212.1 TP-AUX1.PAD TVS2201.4
AUX_2.2: J2000.AUX_2@1 J2000.AUX_2@2 R2211.1 TP-AUX2.PAD TVS2201.6
B+: J2000.B+@1 J2000.B+@2 L2000.4
B-: J2000.B-@1 J2000.B-@2 L2000.1
BATTERY_CHARGE: B2100.1 Q2101.5-6-7-8 U2100.14
BATTERY_CONNECT_CONTROL: Q2101.4 U2100.13
BIAS_VOLTS_FOR_NTC_THERMISTOR: R2103.1 U2100.9
BIN: F2000.1 L2000.3
CAN1_H: J2000.CAN_H@1 J2000.CAN_H@2 R2200.2 U2201.7
CAN1_L: J2000.CAN_L@1 J2000.CAN_L@2 R2200.1 U2201.6
CAN_DISCONNECT: D2201.K D2202.K R2203.2 U2201.5
CHARGE_TIMER: C2100.2 U2100.6
CHASSIS: C2000.1 J2000.CHASSIS@1 J2000.CHASSIS@2 R2000.1
CPU_VREF: C2213.2 R2216.2 R2217.2 U2200.VREF
CPU_XTAL1: C2208.2 U2200.XTAL1 X2201.P$1
CPU_XTAL2: C2209.2 U2200.XTAL2 U2203.2 X2201.P$2
DEBUG.13: J2204.13 TP-DBG13.PAD
DEBUG.14: J2204.14 TP-DBG14.PAD
DEBUG.15: J2204.15 TP-DBG15.PAD
DOMINANT_BIT_STUCK_WHEN_HIGH: C2200.2 D2200.A R2202.1 U2202.3
EXT_VREF: R2216.1 TP-VREF.PAD
FB: C2104.1 R2109.1 R2110.2 U2101.FB
GND: B2100.2 C2000.2 C2001.- C2002.1 C2003.1 C2005.2 C2006.2 C2007.1 C2008.1 C2010.2 C2011.1 C2100.1 C2101.1 C2102.1 C2103.1 C2105.1 C2106.1 C2107.1 C2108.1 C2200.1 C2201.2 C2202.2 C2203.1 C2204.1 C2205.2 C2206.1 C2207.1 C2208.1 C2209.1 C2210.2 C2211.2 C2212.2 C2214.2 C2215.2 C2216.2 C2217.1 C2218.1 C2219.2 D2002.ANODE1 D2002.ANODE2 J2100.2 J2204.16 JP2201.2 JP2204.1 L2000.2 LED2101.K LED2200.6 Q2000.2 Q2002.2 Q2200.2 Q2201.2 R2000.2 R2002.1 R2006.1 R2009.1 R2011.1 R2012.1 R2100.2 R2101.2 R2107.1 R2110.1 R2201.1 R2203.1 RT2100.2 TVS2000.ANODE U2000.4 U2001.2 U2002.GND U2100.PGND U2101.GND U2101.PGND U2101.PGND@1 U2101.PGND@2 U2101.PGND@3 U2102.2 U2102.4 U2200.VSS U2200.VSS@1 U2200.VSS@2 U2200.VSS@3 U2200.VSS@4 U2200.VSS@5 U2200.VSS@6 U2201.2 U2202.4 U2203.8 U2203.PGND
HAP_OUT: C2104.2 C2105.2 C2108.2 R2109.2 U2101.VOUT
IN+: C2004.1 R2005.1 R2006.2 U2001.3
IN_CURRENT_LIMIT_PROG: R2101.1 U2100.3
INV-INV: U2202.1 U2202.5
IO_3P3: C2201.1 JP2200.1 U2201.3
IO_GND: JP2201.1 L2200.C L2201.C TVS2200.2 TVS2200.5 TVS2201.2 TVS2201.5
L_IN: L2100.1 U2101.L1
L_OUT: D2100.A L2100.2 U2101.L2
MAX_UVLO: Q2000.3 R2001.1 R2002.2 U2000.6
N$1: L2201.1 R2210.1
N$2: D2200.K R2202.2 U2202.2
N$3: R2008.2 U2002.VC
N$4: R2009.2 U2002.RT
N$5: C2008.2 R2008.1
N$6: D2202.A U2202.7
N$7: LED2100.A R2105.2
N$10: J2100.1 R2104.2 RT2100.1
N$303: LED2200.1 R2205.1
N$316: LED2200.2 Q2200.3
N$331: LED2200.3 R2206.2
N$332: LED2200.5 Q2201.3
N$333: LED2200.4 R2207.2
N$334: Q2001.5-6-7-8 R2003.1
N$335: TP1.1.PAD U2100.5
N$336: LED2100.C R2112.2 U2100.11
N$338: C2103.2 R2108.1 U2101.VINA
N_DRAIN: Q2002.3 R2004.1 U2000.2
N_GATE: C2004.2 Q2002.1 U2001.1
NTC_INPUT_FROM_BATTERY: R2103.2 R2104.1 U2100.8
P_GATE: Q2001.4 U2000.3
PORT0.0/RD1/TXD3/SDA1: TP0.0.PAD U2200.P0[0]/RD1/TXD3/SDA1 U2201.4
PORT0.1/TD1/RXD3/SCL1: TP0.1.PAD U2200.P0[1]/TD1/RXD3/SCL1 U2201.1 U2202.6
PORT0.2/TXD0: J2204.12 R2212.2 TP0.2.PAD U2200.P0[2]/TXD0
PORT0.3/RXD0: J2204.10 R2211.2 TP0.3.PAD U2200.P0[3]/RXD0
PORT0.4/I2SRX_CLK/RD2/CAP2.0: D2201.A TP0.4.PAD U2200.P0[4]/I2SRX_CLK/RD2/CAP2[0]
PORT0.5/I2SRX_WS/TD2/CAP2.1: TP0.5.PAD U2200.P0[5]/I2SRX_WS/TD2/CAP2[1]
PORT0.6/I2SRX_SDA/SSEL1/MAT2.0: TP0.6.PAD U2200.P0[6]/I2SRX_SDA/SSEL1/MAT2[0]
PORT0.7/I2STX_CLK/SCK1/MAT2.1: TP0.7.PAD U2200.P0[7]/I2STX_CLK/SCK1/MAT2[1]
PORT0.8/I2STX_WS/MISO1/MAT2.2: TP0.8.PAD U2200.P0[8]/I2STX_WS/MISO1/MAT2[2]
PORT0.9/I2STX_SDA/MOSI1/MAT2.3: TP0.9.PAD U2200.P0[9]/I2STX_SDA/MOSI1/MAT2[3]
PORT0.10/TXD2/SDA2/MAT3.0: TP0.10.PAD U2200.P0[10]/TXD2/SDA2/MAT3[0]
PORT0.11/RXD2/SCL2/MAT3.1: TP0.11.PAD U2200.P0[11]/RXD2/SCL2/MAT3[1]
PORT0.15/TXD1/SCK0/SCK: TP0.15.PAD U2200.P0[15]/TXD1/SCK0/SCK
PORT0.16/RXD1/SSEL0/SSEL: TP0.16.PAD U2200.P0[16]/RXD1/SSEL0/SSEL
PORT0.17/CTS1/MISO0/MISO: TP0.17.PAD U2200.P0[17]/CTS1/MISO0/MISO
PORT0.18/DCD1/MOSI0/MOSI: TP0.18.PAD U2200.P0[18]/DCD1/MOSI0/MOSI
PORT0.19/DSR1/MCICLK/SDA1: TP0.19.PAD U2200.P0[19]/DSR1/MCICLK/SDA1
PORT0.20/DTR1/MCICMD/SCL1: TP0.20.PAD U2200.P0[20]/DTR1/MCICMD/SCL1
PORT0.21/RI1/MCIPWR/RD1: TP0.21.PAD U2200.P0[21]/RI1/MCIPWR/RD1
PORT0.22/RTS1/MCIDAT0/TD1: TP0.22.PAD U2200.P0[22]/RTS1/MCIDAT0/TD1
PORT0.23/AD0.0/I2SRX_CLK/CAP3.0: TP0.23.PAD U2200.P0[23]/AD0[0]/I2SRX_CLK/CAP3[0]
PORT0.24/AD0.1/I2SRX_WS/CAP3.1: TP0.24.PAD U2200.P0[24]/AD0[1]/I2SRX_WS/CAP3[1]
PORT0.25/AD0.2/I2SRX_SDA/TXD3: TP0.25.PAD U2200.P0[25]/AD0[2]/I2SRX_SDA/TXD3
PORT0.26/AD0.3/AOUT/RXD3: TP0.26.PAD U2200.P0[26]/AD0[3]/AOUT/RXD3
PORT0.27/SDA0: TP0.27.PAD U2200.P0[27]/SDA0
PORT0.28/SCL0: TP0.28.PAD U2200.P0[28]/SCL0
PORT0.29/USB_D+: C2204.2 R2209.2 TP0.29.PAD U2200.P0[29]/USB_D+
PORT0.30/USB_D-: C2203.2 R2210.2 TP0.30.PAD U2200.P0[30]/USB_D-
PORT1.0/GPIO_SPS_DISABLE: Q2000.1 R2012.2 U2200.P1[0]/ENET_TXD0
PORT1.1/GPIO_SPS_V-IN_GOOD: U2000.5 U2200.P1[1]/ENET_TXD1
PORT1.4/GPIO_SPS_5V-OUT_GOOD: U2002.PG U2200.P1[4]/ENET_TX_EN
PORT1.8/HAP_FAST_CHARGE: TP1.8.PAD U2100.4 U2200.P1[8]/ENET_CRS
PORT1.9/ENET_RXD0: TP1.9.PAD U2200.P1[9]/ENET_RXD0
PORT1.10/!BAT_CHARGING: R2112.1 TP1.10.PAD U2200.P1[10]/ENET_RXD1
PORT1.14/HAP_DISABLE: R2107.2 TP1.14.PAD U2102.1 U2200.P1[14]/ENET_RX_ER
PORT1.15/GPIO_SPS_5V_PWR_GOOD: TP1.15.PAD U2200.P1[15]/ENET_REF_CLK
PORT1.16/ENET_MDC: TP1.16.PAD U2200.P1[16]/ENET_MDC
PORT1.17/ENET_MDIO: TP1.17.PAD U2200.P1[17]/ENET_MDIO
PORT1.18/GPIO_USB_HIGH_SPEED_SELECT: R2208.2 TP1.18.PAD U2200.P1[18]/USB_UP_LED/PWM1[1]/CAP1[0]
PORT1.19/CAP1.1/LED_G: R2205.2 TP1.19.PAD U2200.P1[19]/CAP1[1]
PORT1.20/PWM1.2/SCK0: TP1.20.PAD U2200.P1[20]/PWM1[2]/SCK0
PORT1.21/PWM1.3/SSEL0: TP1.21.PAD U2200.P1[21]/PWM1[3]/SSEL0
PORT1.22/MAT1.0/LED_R: Q2201.1 TP1.22.PAD U2200.P1[22]MAT1[0]
PORT1.23/PWM1.4/MISO0: TP1.23.PAD U2200.P1[23]/PWM1[4]/MISO0
PORT1.24/PWM1.5/MOSI0: TP1.24.PAD U2200.P1[24]/PWM1[5]/MOSI0
PORT1.25/MAT1.1/LED_B: Q2200.1 TP1.25.PAD U2200.P1[25]/MAT1[1]
PORT1.26/PWM1.6/CAP0.0: TP1.26.PAD U2200.P1[26]/PWM1[6]/CAP0[0]
PORT1.27/CAP0.1: TP1.27.PAD U2200.P1[27]/CAP0[1]
PORT1.28/PCAP1.0/MAT0.0: TP1.28.PAD U2200.P1[28]/PCAP1[0]/MAT0[0]
PORT1.29/PCAP1.1/MAT0.1: TP1.29.PAD U2200.P1[29]/PCAP1[1]/MAT0[1]
PORT1.30/VBUS/AD0.4: TP1.30.PAD U2200.P1[30]/VBUS/AD0[4]
PORT1.31/SCK1/AD0.5: TP1.31.PAD U2200.P1[31]/SCK1/AD0[5]
PORT2.0/PWM1.1/TXD1/TRACECLK: TP2.0.PAD U2200.P2[0]/PWM1[1]/TXD1/TRACECLK
PORT2.1/PWM1.2/RXD1/PIPESTAT0: TP2.1.PAD U2200.P2[1]/PWM1[2]/RXD1/PIPESTAT0
PORT2.2/PWM1.3/CTS1/PIPESTAT1: TP2.2.PAD U2200.P2[2]/PWM1[3]/CTS1/PIPESTAT1
PORT2.3/PWM1.4/DCD1/PIPESTAT2: TP2.3.PAD U2200.P2[3]/PWM1[4]/DCD1/PIPESTAT2
PORT2.4/PWM1.5/DSR1/TRACESYNC: TP2.4.PAD U2200.P2[4]/PWM1[5]/DSR1/TRACESYNC
PORT2.5/PWM1.6/DTR1/TRACEPKT0: TP2.5.PAD U2200.P2[5]/PWM1[6]/DTR1/TRACEPKT0
PORT2.6/PCAP1.0/RI1/TRACEPKT1: TP2.6.PAD U2200.P2[6]/PCAP1[0]/RI1/TRACEPKT1
PORT2.7/RD2/RTS1/TRACEPKT2: TP2.7.PAD U2200.P2[7]/RD2/RTS1/TRACEPKT2
PORT2.8/TD2/TXD2/TRACEPKT3: TP2.8.PAD U2200.P2[8]/TD2/TXD2/TRACEPKT3
PORT2.9/USB_CONNECT/RXD2/EXTIN0: TP2.9.PAD U2200.P2[9]/USB_CONNECT/RXD2/EXTIN0
PORT2.10/!EINT0!: J2204.6 R2213.1 TP2.10.PAD U2200.P2[10]/#EINT0
PORT2.11/!EINT1!/MCIDAT1/I2STX_CLK: TP2.11.PAD U2200.P2[11]/#EINT1/MCIDAT1/I2STX_CLK
PORT2.12/!EINT2!/MCIDAT2/I2STX_WS: TP2.12.PAD U2200.P2[12]/#EINT2/MCIDAT2/I2STX_WS
PORT2.13/!EINT3!/MCIDAT3/I2STX_SDA: TP2.13.PAD U2200.P2[13]/#EINT3/MCIDAT3/I2STX_SDA
PORT3.25/MAT0.0/PWM1.2: TP3.25.PAD U2200.P3[25]/MAT0[0]/PWM1[2]
PORT3.26/MAT0.1/RXD3: TP3.26.PAD U2200.P3[26]/MAT0[1]/PWM1[3]
PORT4.28/MAT2.0/TXD3: TP4.28.PAD U2200.P4[28]/MAT2[0]/TXD3
PORT4.29/MAT2.1/RXD3: TP4.29.PAD U2200.P4[29]/MAT2[1]/RXD3
PROG: R2100.1 TP0.12.PAD U2100.12
PROTECTED_DC_POWER: C2101.2 C2102.2 Q2100.1-2-3 Q2101.1-2-3 R2102.2 R2105.1 R2108.2 U2100.2 U2101.VIN U2102.6 U2102.8
REF: U2001.4 U2001.5
RTC_XTAL-A: C2206.2 U2200.RTCX1 X2200.P$2
RTC_XTAL-B: C2207.2 U2200.RTCX2 X2200.P$1
RTCK: J2204.8 U2200.RTCK
SLOPECONTROL: R2201.2 U2201.8
SOFT_START: C2007.2 R2007.1 U2002.RUN/SS
SPS_3P3_LED: LED2101.A R2111.1
SPS_5_REG: C2106.2 C2107.2 D2100.C TP-HAP-5V.PAD
SPS_OUT: C2010.1 D2001.A L2001.2 Q2100.5-6-7-8 R2005.2 R2010.2 U2002.BD U2100.1 U2100.7
SPS_SYNC: U2002.SYNC U2101.PS/SYNC U2203.12
TCK: J2204.11 U2200.TCK
TDI: J2204.3 U2200.TDI
TDO: J2204.2 U2200.TDO
TMS: J2204.5 U2200.TMS
TP-VBAT: C2212.1 R2215.2 TP-VBAT.PAD U2200.VBAT
USB_D+: J2000.USB_H@1 J2000.USB_H@2 L2200.1 TVS2200.6
USB_D-: J2000.USB_L@1 J2000.USB_L@2 L2201.2 TVS2200.4
USBD+: L2200.2 R2208.1 R2209.1
V+: C2003.2 D2001.K U2001.6
V_BOOST: C2009.1 U2002.BOOST
V_FEEDBACK: R2010.1 R2011.2 U2002.FB
V_FUSED: C2001.+ C2002.2 C2011.2 F2000.2 Q2001.1-2-3 R2001.2 TVS2000.CATHODE U2000.1
V_SWITCH: C2009.2 D2002.CATHODE L2001.1 U2002.SW
VIN: C2005.1 C2006.1 R2003.2 R2004.2 R2007.2 U2002.VIN
VINA: U2101.EN U2102.5